# Altium PCB LED Driver PCB.PcbDoc
Units mm, origin at the board's own origin, x right, y up, seen from the top; angles counter-clockwise.
Board outline 95 x 86.5 mm, 2 copper layers (Top Layer, Bottom Layer); 81 components, 56 nets, 263 pads, 86 vias.
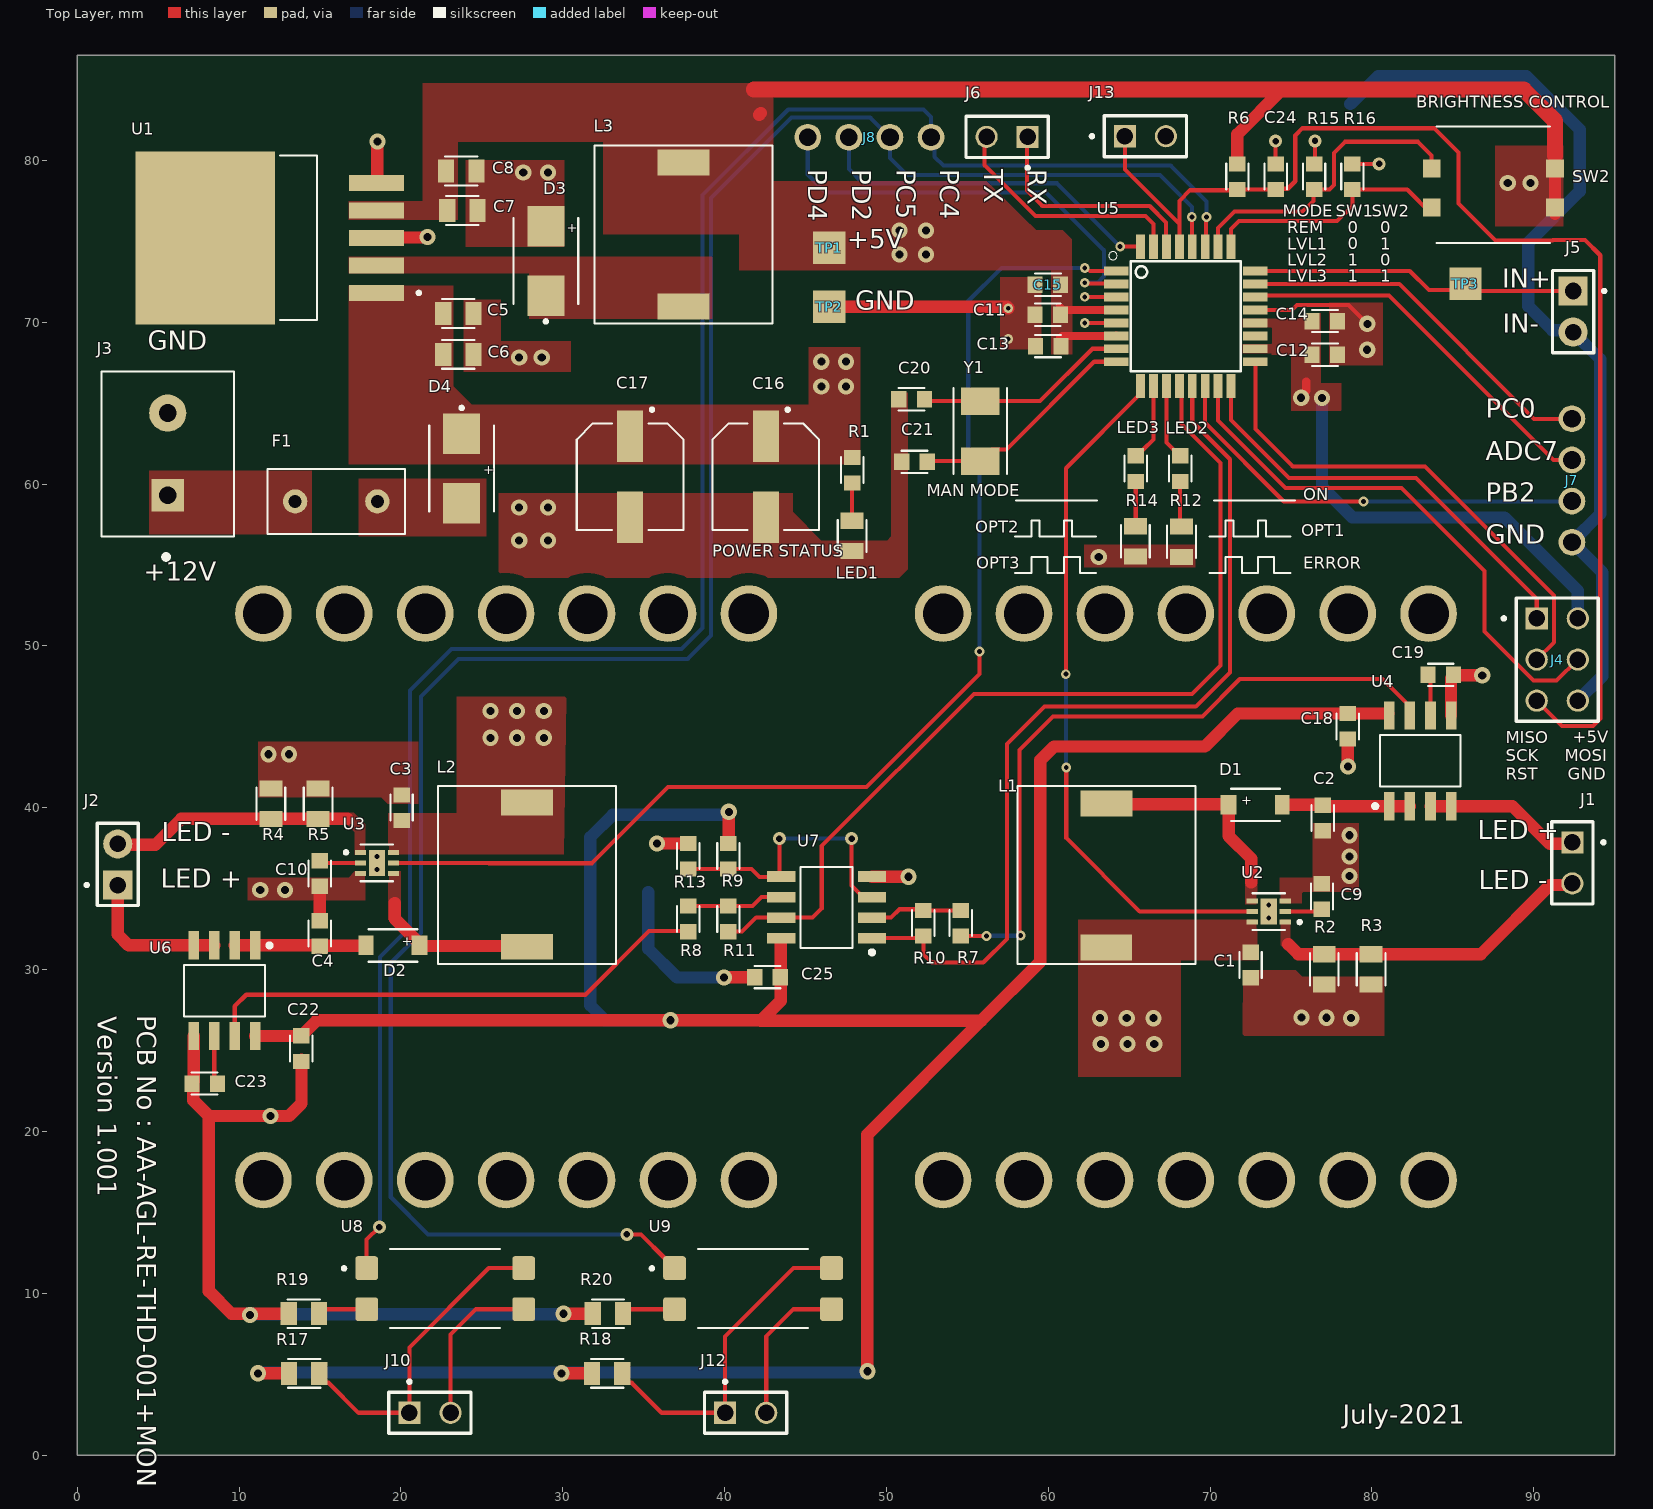
[diagram p0: Top Layer view]
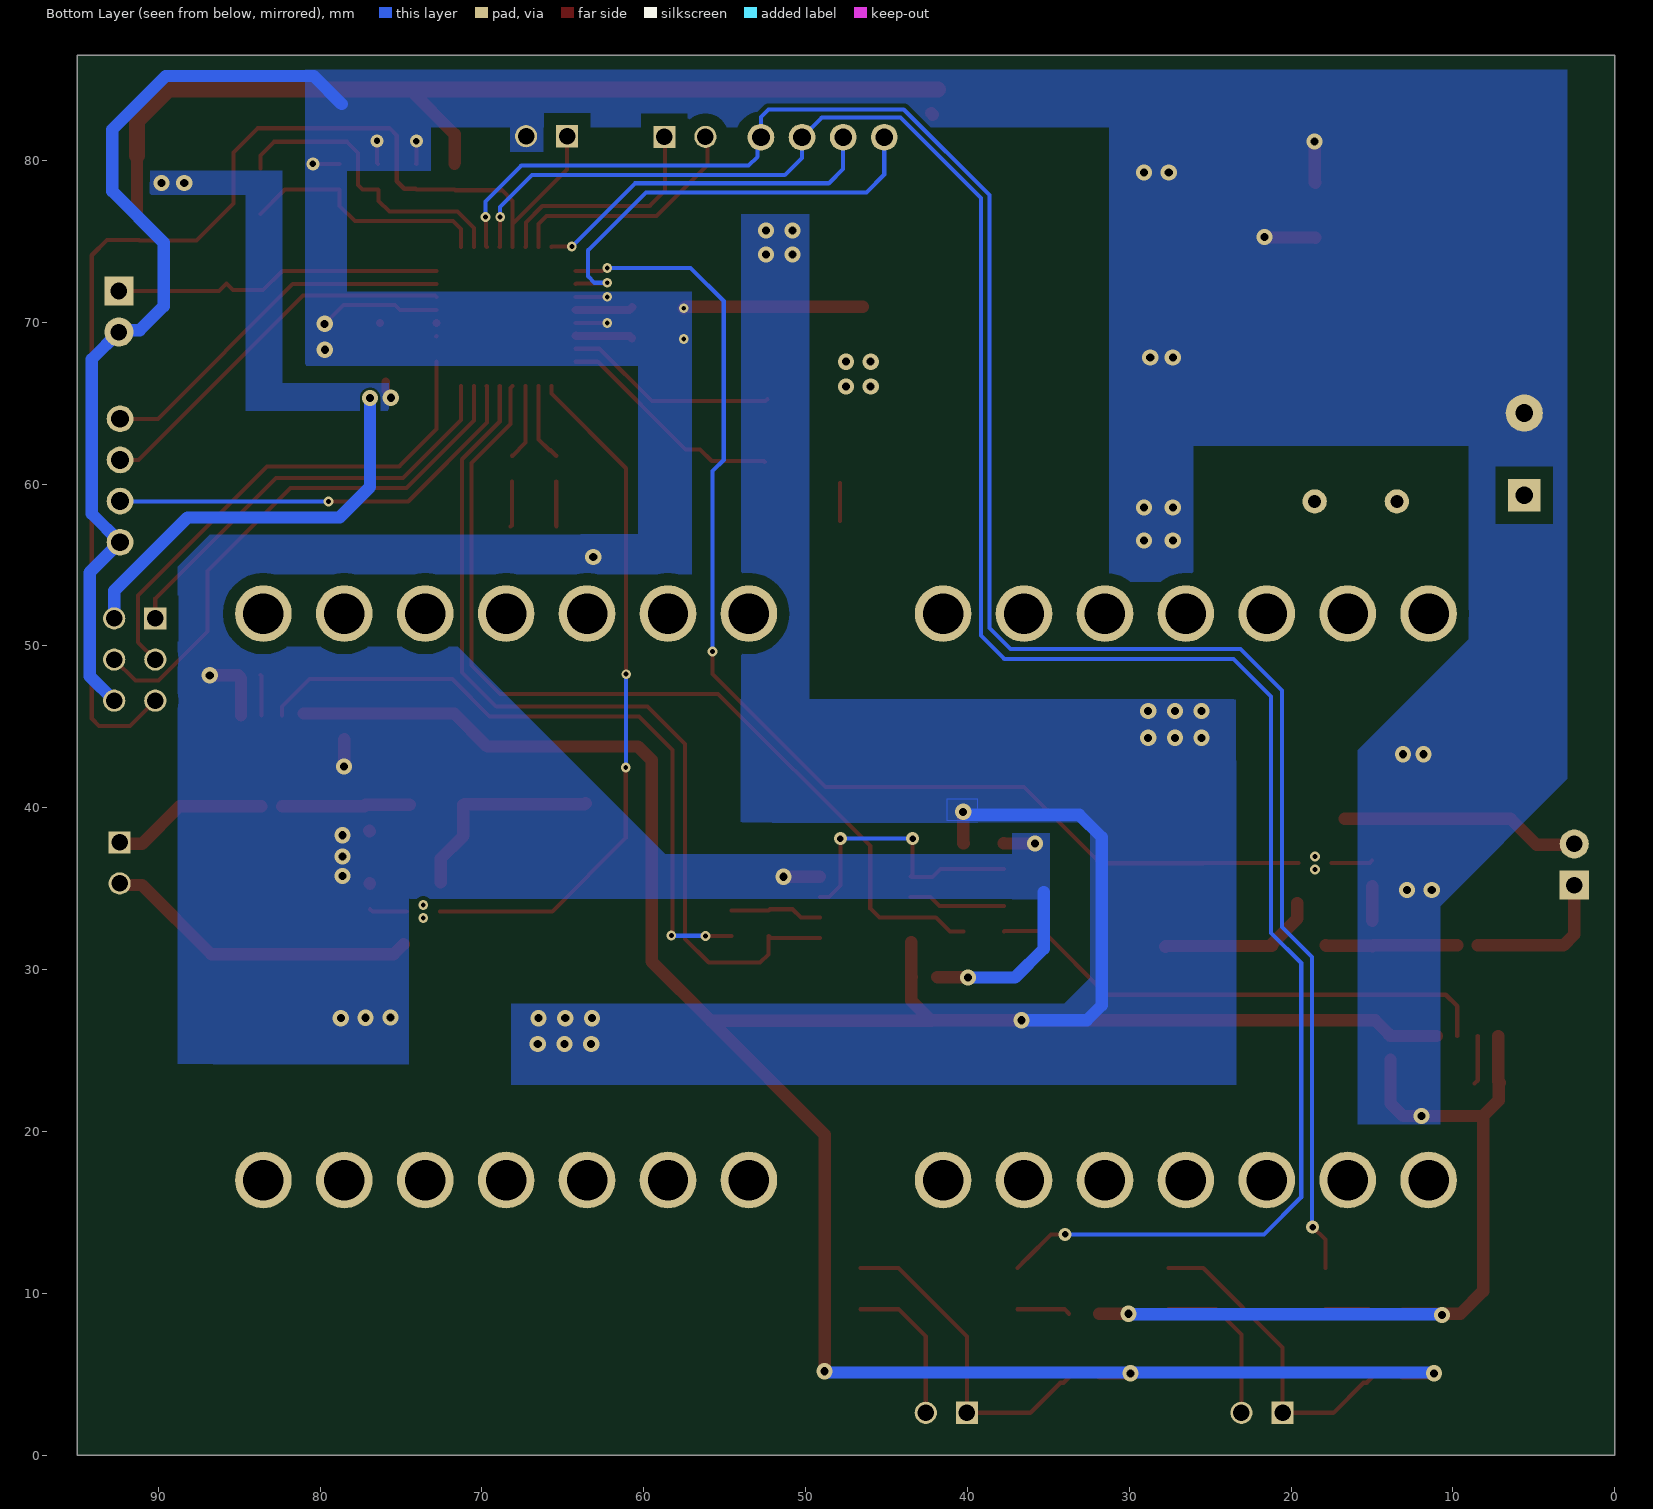
[diagram p1: Bottom Layer view, seen from below]

## Layer stack, top to bottom
Top Solder: solder mask 0.0102, Solder Resist, Dk 3.5
Top Layer: signal copper 0.0356
Dielectric 1: dielectric 0.32, FR-4, Dk 4.8
Bottom Layer: signal copper 0.0356
Bottom Solder: solder mask 0.0102, Solder Resist, Dk 3.5

## Board outline
0,86.5 95,86.5 95,0 0,0

## Design rules (kind name [scope] priority, off if disabled: settings)
Clearance "Power Clearance" [InNet('+12') or InNet('+5') or InNet('GND')] p1: gap=0.254 ignorepadtopadclearanceinfootprint=FALSE except(0: Arc-Hole Track-Hole SMDPad-Hole THPad-Hole Via-Hole Fill-Hole Poly-Hole Region-Hole Text-Hole; 0.127: SMDPad-SMDPad; 0.762: THPad-Fill THPad-Poly THPad-Region)
Clearance [All] p2: gap=0.254 ignorepadtopadclearanceinfootprint=FALSE except(0: Arc-Hole Track-Hole SMDPad-Hole THPad-Hole Via-Hole Fill-Hole Poly-Hole Region-Hole Text-Hole; 0.127: SMDPad-SMDPad; 1.27: Fill-Text Poly-Text Region-Text)
PolygonConnect [All] p1: connectstyle=Direct reliefconductorwidth=0.254 reliefentries=4 polygonreliefangle="90 Angle" airgapwidth=0.254
RoutingVias "Power Vias" [InNetClass('LED_Current') or InNet('+12') or InNet('+5') or InNet('GND')] p1: holewidth=0.7 width=1.4 viastyle="Through Hole" minholewidth=0.3 minwidth=0.6 maxholewidth=0.8 maxwidth=1.6
RoutingVias "Signal Vias" [All] p2: holewidth=0.4 width=0.8 viastyle="Through Hole" minholewidth=0.3 minwidth=0.6 maxholewidth=0.5 maxwidth=1
SolderMaskExpansion [All] p1: expansion=0.102 istentingtop=FALSE
Width "Schematic Width Constraint" [InNetClass('LED_Current')] p1: maxlimit=1.016 minlimit=0.254 preferedwidth=0.762 minimp=50.000000 maximp=50.000000 favimp=50.000000
Width [All] p2: maxlimit=1 minlimit=0.254 preferedwidth=0.254 minimp=50.000000 maximp=50.000000 favimp=50.000000
30 further rules are at their usual default settings.

## Classes and differential pairs
net class LED_Current: +5 LED_ANODE_1 LED_ANODE_1_OUT LED_ANODE_2 LED_ANODE_2_OUT LED_CATHODE_1 LED_CATHODE_2 NetD1_A NetD2_A

## Components (designator, comment, footprint, x,y, rotation, side; value= is the part's Value field where it differs from the comment)
C1 "4.7uF" RES603 72.5,30.29 r90 top
C2 "1uF" RES603 76.962,39.372 r90 top
C3 "4.7uF" RES603 20.041,40.007 r270 top
C4 "1uF" RES603 14.986,32.232 r270 top
C5 "10uF" RES805 23.548,70.541 r180 top
C6 "10uF" RES805 23.546,68.021 r180 top
C7 "10uF" RES805 23.8,76.911 r180 top
C8 "10uF" RES805 23.724,79.35 r180 top
C9 "220nF" RES603 76.911,34.523 r270 top
C10 "220nF" RES603 14.986,35.943 r90 top
C11 "0.1uF" RES603 59.967,70.462 r0 top
C12 "0.1uF" RES603 77.089,67.998 r180 top
C13 "0.1uF" RES603 59.995,68.531 r0 top
C14 "0.1uF" RES603 77.089,70.081 r180 top
C15 "1uF" RES603 59.972,72.314 r0 top
C16 "47uF" VEJ470M1HTR-0607 42.545,60.454 r270 top
C17 "47uF" VEJ470M1HTR-0607 34.163,60.454 r270 top
C18 "0.1uF" RES603 78.511,45.034 r90 top
C19 "100nF" RES603 84.252,48.211 r180 top
C20 "22pF" RES603 51.555,65.247 r180 top
C21 "22pF" RES603 51.732,61.373 r180 top
C22 "0.1uF" RES603 13.843,25.123 r90 top
C23 "100nF" RES603 7.874,22.964 r0 top
C24 "0.1uF" RES603 74.054,79 r270 top
C25 "0.1uF" RES603 42.647,29.542 r0 top
D1 "LMBR0540T1G" LMBR0540T1G 72.796,40.185 r180 top
D2 "LMBR0540T1G" LMBR0540T1G 19.5,31.5 r0 top
D3 "B330B-13-F" B330B-13-F 28.956,73.798 r90 top
D4 "B330B-13-F" B330B-13-F 23.749,60.962 r270 top
F1 "Fuse" 39215000000 16.002,58.93 r0 top
J1 "2 Pin Header" "2POS 2.54mm Pin Header"#1 92.382,36.596 r270 top
J2 "2 Pin Header" "2POS 2.54mm Pin Header"#2 2.5,36.5 r90 top
J3 "2 Pin Header" "2POS 5.08mm Screw Connector" 5.588,61.851 r90 top
J4 "3x2 Pin Header" "2x3POS 2.54mm Pin Header" 91.449,49.162 r90 top
J5 "2 Pin Header" "2POS 2.54mm Pin Header"#2 92.431,70.665 r270 top
J6 "2 Pin Header" "2POS 2.54mm Pin Header"#1 57.455,81.46 r180 top
J7 "4 Pin Header" "4POS 2.54MM PIN HEADER" 92.354,60.225 r270 top
J8 "4 Pin Header" "4POS 2.54MM PIN HEADER" 48.946,81.434 r0 top
J10 "2 Pin Header" "2POS 2.54mm Pin Header"#1 21.793,2.618 r0 top
J12 "2 Pin Header" "2POS 2.54mm Pin Header"#1 41.3,2.618 r0 top
J13 "2 Pin Header" "2POS 2.54mm PIN Header - duplicate" 66,81.5 r0 top
L1 "Inductor" CDRH104RNP-220NC 63.59,35.846 r90 top
L2 "Inductor" CDRH104RNP-220NC 27.783,35.846 r270 top
L3 "Inductor" CDRH104RNP-220NC 37.465,75.44 r90 top
LED1 "LED" LED603 47.879,60.863 r270 top
LED2 "LED" LED603 68.148,60.962 r270 top
LED3 "LED" LED603 65.405,60.962 r270 top
R1 "2.4k" RES805 47.879,56.798 r90 top
R2 "1.15" RES805 77.052,30.013 r90 top
R3 "1.15" RES805 79.95,30.013 r90 top
R4 "1.15" RES805 11.96,40.253 r270 top
R5 "1.15" RES805 14.883,40.253 r270 top
R6 "10K" RES603 71.686,79 r90 top
R7 "1k" RES603 54.585,32.87 r270 top
R8 "1k" RES603 37.746,33.138 r270 top
R9 "100k" RES603 40.234,37.012 r90 top
R10 "3.3k" RES603 52.273,32.87 r90 top
R11 "3.3k" RES603 40.234,33.138 r90 top
R12 "1k" RES805 68.224,56.441 r270 top
R13 "100k" RES603 37.746,37.012 r270 top
R14 "1k" RES805 65.38,56.466 r270 top
R15 "10k" RES603 76.423,79 r270 top
R16 "10k" RES603 78.791,79 r270 top
R17 "150" RES805 14.016,5.057 r180 top
R18 "150" RES805 32.741,5.057 r180 top
R19 "330" RES805 14,8.739 r0 top
R20 "330" RES805 32.791,8.739 r0 top
SW2 "2 DIP Switch" EM-02KP 87.5,78.5 r180 top
TP1 "Test Point" "TP SMD" 46.457,74.602 r0 top
TP2 "Test Point" "TP SMD" 46.457,70.97 r0 top
TP3 "Test Point" "TP SMD" 85.776,72.392 r0 top
U1 "LM2596" LM2596-TO263 7.902,75.215 r180 top
U2 "TPS61165" TPS611DRVR 73.619,33.592 r180 top
U3 "TPS61165" TPS611DRVR 18.516,36.593 r0 top
U4 "ACS712" SOIC127P600X175-8N 82.982,42.903 r90 top
U5 "ATMEGA328P" ATMEGA328P-AU 68.496,70.365 r0 top
U6 "ACS712" SOIC127P600X175-8N 9.095,28.7 r270 top
U7 "LM358" SOIC127P600X175-8N 46.303,33.851 r180 top
U8 "EL817S1" EL817S1 22.733,10.289 r0 top (schematic designator J9)
U9 "EL817S1" EL817S1 41.758,10.289 r0 top (schematic designator J11)
Y1 "Crystal" X503216MSB2GI 55.796,63.278 r90 top

## Footprints (in the part's own frame and the unit in brackets; to place one, negate y for a bottom-side part, rotate by r counter-clockwise, add the part's x,y. Pads: shape width x height; smd on the part's side, far side on the other; paste and mask are expansions set on the pad)
"2POS 2.54mm Pin Header"#1 [mm]
  rect 1.37x1.37 hole 1.02: 1(-1.27,0)
  round 1.37 hole 1.02: 2(1.27,0)
  silkscreen extent -2.54,-1.27 2.54,2.02
"2POS 2.54mm Pin Header"#2 [mm]
  rect 1.8x1.8 hole 1.02: 1(-1.27,0)
  round 1.8 hole 1.02: 2(1.27,0)
  silkscreen extent -2.54,-1.27 2.54,2.02
"2POS 2.54mm PIN Header - duplicate" [mm]
  rect 1.37x1.37 hole 1.02: 1(-1.27,0)
  round 1.37 hole 1.02: 2(1.27,0)
  silkscreen extent -3.4,-1.27 2.54,1.27
"2POS 5.08mm Screw Connector" [mm]
  rect 2x2 hole 1.1: 1(-2.54,0)
  round 2.3 hole 1.1: 2(2.54,0)
  silkscreen extent -6.5,-4.1 5.11,4.1
"2x3POS 2.54mm Pin Header" [mm]
  rect 1.37x1.37 hole 1.02: 1(2.54,1.27)
  round 1.37 hole 1.02: 2(0,1.27) 3(-2.54,1.27) 4(-2.54,-1.27) 5(0,-1.27) 6(2.54,-1.27)
  silkscreen extent -3.81,-2.54 3.81,3.4
"4POS 2.54MM PIN HEADER" [mm]
  round 1.65 hole 1.1: 1(-3.81,0) 2(-1.27,0) 3(1.27,0) 4(3.81,0)
39215000000 [mm]
  round 1.5 hole 0.8: 1(-2.54,0) 2(2.54,0)
  silkscreen extent -4.25,-2 4.25,2
ATMEGA328P-AU [mm]
  rect 1.5x0.55 smd: 1(-4.3,2.8) 2(-4.3,2) 3(-4.3,1.2) 4(-4.3,0.4) 5(-4.3,-0.4) 6(-4.3,-1.2) 7(-4.3,-2) 8(-4.3,-2.8) 17(4.3,-2.8) 18(4.3,-2) 19(4.3,-1.2) 20(4.3,-0.4) 21(4.3,0.4) 22(4.3,1.2) 23(4.3,2) 24(4.3,2.8)
  rect 0.55x1.5 smd: 9(-2.8,-4.3) 10(-2,-4.3) 11(-1.2,-4.3) 12(-0.4,-4.3) 13(0.4,-4.3) 14(1.2,-4.3) 15(2,-4.3) 16(2.8,-4.3) 25(2.8,4.3) 26(2,4.3) 27(1.2,4.3) 28(0.4,4.3) 29(-0.4,4.3) 30(-1.2,4.3) 31(-2,4.3) 32(-2.8,4.3)
  silkscreen extent -4.75,-3.4 3.4,4
B330B-13-F [mm]
  rect 2.5x2.3 smd: A(2.15,0) C(-2.15,0)
  silkscreen extent -3.85,-2 2.65,2
CDRH104RNP-220NC [mm]
  rect 1.6x3.2 smd: 1(-4.471,0.01) 2(4.429,0)
  silkscreen extent -5.5,-5.5 5.5,5.5
EL817S1 [mm]
  rrect25% 1.41x1.47 smd: 1(-4.85,1.27) 2(-4.85,-1.27) 3(4.85,-1.27) 4(4.85,1.27)
  silkscreen extent -6.35,-2.44 3.4,2.44
EM-02KP [mm]
  rect 1.1x1.1 smd: 1(-3.81,1.4) 2(-3.81,-1) 3(3.81,-1) 4(3.81,1.4)
  silkscreen extent -3.5,-3.6 3.5,3.6
LED603 [mm]
  rect 0.94x1.02 smd: A(-0.79,0) C(0.79,0)
  silkscreen extent -0.8,-0.69 0.8,0.69
LM2596-TO263 [mm]
  rect 3.4x1 smd paste-3 mask+0: 1(-10.6,3.4) 2(-10.6,1.7) 3(-10.6,0) 4(-10.6,-1.7) 5(-10.6,-3.4)
  rect 8.6x10.7 smd paste-6 mask+0: 6(0,0)
  silkscreen extent -13.3,-5.08 -4.62,5.08
LMBR0540T1G [mm]
  rect 0.99x1.22 smd: A(1.655,0)
  rect 0.91x1.22 smd: C(-1.655,0)
  silkscreen extent -1.5,-1 1.5,1
RES603 [mm]
  rect 0.94x1.02 smd: 1(-0.79,0) 2(0.79,0)
  silkscreen extent -0.8,-0.69 0.8,0.69
RES805 [mm]
  rect 1x1.42 smd: 1(-0.935,0) 2(0.935,0)
  silkscreen extent -1,-0.89 1,0.89
SOIC127P600X175-8N [mm] "SOIC, 8-Leads, Body 4.90x3.90mm, Pitch 1.27mm, IPC Medium Density"
  rect 1.75x0.65 smd: 1(-2.8,1.905) 2(-2.8,0.635) 3(-2.8,-0.635) 4(-2.8,-1.905) 5(2.8,-1.905) 6(2.8,-0.635) 7(2.8,0.635) 8(2.8,1.905)
  silkscreen extent -2.92,-2.5 1.6,2.9, body extent -2.68,-2.5 2.68,2.5, height 1.8
"TP SMD" [mm]
  rect 2x2 smd: 1(0,0)
TPS611DRVR [mm]
  rect 0.69x0.32 smd: 1(-1.02,0.65) 2(-1.02,0) 3(-1.02,-0.65) 4(1.02,-0.65) 5(1.02,0) 6(1.02,0.65)
  rect 1x1.6 smd paste-2: 7(0,0)
  silkscreen extent -2.01,-1.13 1,1.13
VEJ470M1HTR-0607 [mm]
  rect 3.2x1.6 smd: 1(-2.5,0) 2(2.5,0)
  silkscreen extent -4.25,-3.3 3.3,3.3, body extent 0,0 0,0
X503216MSB2GI [mm]
  rect 1.7x2.4 smd: 1(-1.85,0) 2(1.85,0)
  silkscreen extent -2.65,-1.65 2.65,1.65

## Part data
C1 C2 C3 C4 C5 C6 C7 C8 C9 C10 C11 C12 C13 C14 C15 C18 C19 C20 C21 C22 C23 C24 C25: library part Capacitor
C16 C17: library part "Cap Pol"
D1 D2 D3 D4: library part "Schottky Diode"
R1 R2 R3 R4 R5 R6 R7 R8 R9 R10 R11 R12 R13 R14 R15 R16 R17 R18 R19 R20: library part Resistor

## Free pads (board coordinates)
  round 3.5 hole 2.5: 8(11.5,17) 8(11.5,52) 8(53.5,17) 8(53.5,52) 9(16.5,17) 9(16.5,52) 9(58.5,17) 9(58.5,52) 10(21.5,17) 10(21.5,52) 10(63.5,17) 10(63.5,52) 11(26.5,17) 11(26.5,52) 11(68.5,17) 11(68.5,52) 12(31.5,17) 12(31.5,52) 12(73.5,17) 12(73.5,52) 13(36.5,17) 13(36.5,52) 13(78.5,17) 13(78.5,52) 14(41.5,17) 14(41.5,52) 14(83.5,17) 14(83.5,52)

## Via types
v1: diameter 1, hole 0.5, Top Layer to Bottom Layer, 60 vias
v2: diameter 0.6, hole 0.3, Top Layer to Bottom Layer, 19 vias
v3: diameter 0.8, hole 0.4, Top Layer to Bottom Layer, 7 vias

## Nets (pads, with @x,y where several pads share a name; then routed paths per layer and width w, separated by ;. In a path a pad name is that pad's centre, name@x,y a point inside that pad or via, vN(x,y) a via of type N, cw(c..) or ccw(c..) an arc to the next point about the centre after c; other vN are vias at no path point)
+5: C1.2 C3.2 C7.2 C8.2 C11.2 C12.2 C13.2 C14.2 C15.2 C18.2 C22.2 C25.2 J4.6 L1.1 L2.1 L3.2 R6.2 R9.2 R17.2 R18.2 SW2.1 SW2.2 TP1.1 U1.4 U2.6 U3.6 U4.8 U5.4 U5.6 U5.18 U5.20 U6.8 U7.8 | length 279.7
  Top Layer w0.508: C11.2@60.706,70.944 60.885,70.765 U5.4 ; C13.2@60.72,69.028 60.734,69.014 60.868,69.148 64.179,69.148 U5.6 ; U5.20 U5.20@72.802,69.959 ; v1(75.626,65.341) 75.626,65.451 75.946,65.771 75.946,66.321 ; C14.2@76.293,69.959 C14.2@76.299,69.954
  Top Layer w0.762: U6.8 C22.2@13.683,25.9 ; v1(11.176,5.057) R17.2 ; C22.2 13.883,25.913 13.972,26.002 13.972,26.042 14.806,26.875 v1(36.652,26.875) 42.215,26.875 42.24,26.85 ; v1(29.921,5.057) R18.2 ; R9.2 40.246,37.815 40.246,39.74 v1(40.259,39.753) ; 41.758,84.432 41.808,84.381 ; 42.139,82.831 42.236,82.928 ; U7.8@43.47,31.701 43.47,29.575 C25.2 43.473,29.505 43.473,28.083 42.24,26.85 ; v1(48.819,5.184) 48.819,19.814 55.855,26.85 ; R6.2 71.686,79.872 71.679,79.879 71.679,81.612 74.447,84.381 ; U4.8@81.021,45.824 C18.2 71.704,45.824 69.672,43.792 60.35,43.792 59.512,42.953 59.512,30.507 55.855,26.85 ; SW2.1@91.31,76.7 91.31,80.3 ; 42.24,26.85 55.855,26.85
  Top Layer w1: 41.808,84.381 74.447,84.381 89.383,84.381 91.31,82.453 91.31,80.3
  Bottom Layer w0.762: v1(11.176,5.057) 11.222,5.102 11.39,5.102 11.395,5.107 48.574,5.107 48.605,5.138 48.773,5.138 v1(48.819,5.184) ; v1(36.652,26.875) 32.625,26.875 31.699,27.801 31.699,38.178 33.096,39.575 40.017,39.575 40.195,39.753 v1(40.259,39.753) ; v1(76.911,65.331) 76.911,59.819 78.791,57.939 88.189,57.939 92.71,53.418 92.71,51.711 J4.6
  other v1: 63.246,25.402 64.897,25.402 66.548,25.402 63.198,27 64.849,27 66.5,27 25.527,44.325 27.178,44.325 28.829,44.325 25.527,45.976 27.178,45.976 28.829,45.976 50.8,74.193 52.451,74.193 50.8,75.667 52.451,75.667 88.392,78.615 89.789,78.615
+12: C5.2 C6.2 C16.1 C17.1 D4.C LED1.A U1.1
  other v1: 45.974,66.042 47.498,66.042 45.974,67.566 47.498,67.566
ADC_IN: J5.1 TP3.1 U5.24 | length 20.5
  Top Layer w0.254: U5.24 82.336,73.165 83.515,71.986 85.369,71.986 TP3.1 86.233,71.935 J5.1
ANALOG_IN_1: J7.1 U5.23 | length 23
  Top Layer w0.254: U5.23 81.688,72.365 90.018,64.035 J7.1
ANALOG_IN_3: J7.2 U5.22 | length 23.8
  Top Layer w0.254: U5.22 72.886,71.655 81.051,71.655 91.211,61.495 J7.2
ANALOG_IN_4: J8.4 U5.27 U8.1 | length 123.1
  Top Layer w0.254: U8.1 17.883,13.315 v3(18.661,14.093) ; U5.27 69.735,74.704 69.735,76.468 v2(69.774,76.507)
  Bottom Layer w0.254: v3(18.661,14.093) 18.694,14.127 18.694,30.787 20.549,32.641 20.549,47.246 23.114,49.811 37.325,49.811 38.631,51.117 38.631,77.86 43.933,83.162 52.282,83.162 52.756,82.687 J8.4 52.971,81.219 52.971,80.228 53.518,79.682 67.564,79.682 69.774,77.472 v2(69.774,76.507)
ANALOG_IN_5: J8.3 U5.28 U9.1 | length 134.8
  Top Layer w0.254: v3(33.96,13.642) 34.825,13.642 36.33,12.137 36.333,12.137 36.908,11.562 U9.1 ; v2@68.873,76.444 68.885,76.433 68.885,74.676 U5.28
  Bottom Layer w0.254: v3(33.96,13.642) 21.666,13.642 19.369,15.939 19.369,30.406 21.234,32.271 21.234,46.89 23.546,49.202 37.719,49.202 39.167,50.65 39.167,77.677 44.143,82.654 48.997,82.654 J8.3 50.216,80.164 51.283,79.098 66.904,79.098 68.873,77.128 v2(68.873,76.507)
GND: C1.1 C2.1 C3.1 C4.1 C5.1 C6.1 C7.1 C8.1 C9.1 C10.1 C11.1 C12.1 C13.1 C14.1 C15.1 C16.2 C17.2 C18.1 C19.1 C20.2 C21.2 C22.1 C23.1 C24.1 C25.1 D3.A J3.2 J4.4 J5.2 J7.4 J13.2 R1.1 R2.1 R3.1 R4.1 R5.1 R12.2 R13.1 R14.2 R15.1 R16.1 R19.1 R20.1 TP2.1 U1.3 U1.5 U2.3 U3.3 U4.5 U5.3 U5.5 U5.21 U6.5 U7.4 | length 165.4
  Top Layer w0.254: v2@62.082,69.957 v2@62.085,69.959 ; v2@62.082,71.573 v2@62.086,71.569 ; v2@62.259,71.569 64.192,71.569 U5.3 ; v2@62.361,69.959 64.19,69.959 U5.5 ; U5.21 75.07,70.765 75.376,71.071 78.548,71.071 v1(79.713,69.906) ; v3(74.043,81.19) 74.043,79.805 74.041,79.803 C24.1 ; R15.1 76.479,79.847 v3(76.479,81.212) ; R16.1 78.797,79.783 v3(80.442,79.783)
  Top Layer w0.762: U6.5 7.19,23.11 7.084,23.004 7.173,22.915 7.173,21.912 8.128,20.957 ; R19.1 9.526,8.739 8.128,10.137 8.128,20.957 ; C22.1@13.851,24.448 13.851,21.727 13.081,20.957 v1(11.938,20.957) 8.128,20.957 ; C4.1 C10.1 ; U1.3 18.526,75.239 21.617,75.239 v1(21.641,75.262) ; U1.5 18.542,78.655 v1(18.542,81.18) ; v1(30.048,8.74) R20.1 ; v1(35.814,37.797) 35.817,37.8 37.743,37.8 R13.1 ; v1(39.954,29.517) 39.967,29.529 41.844,29.529 C25.1 ; TP2.1 57.429,70.97 v2(57.527,70.872) ; U7.4 49.111,35.748 51.351,35.748 v1(51.359,35.74) ; C9.1 C9.1@76.937,35.339 ; C2.1@76.937,38.557 C2.1 ; v1(78.511,42.547) C18.1 ; U4.5 84.887,48.016 85.042,48.171 C19.1 85.055,48.198 86.804,48.198 v1(86.817,48.186)
  Bottom Layer w0.762: v1(10.668,8.663) 10.706,8.701 30.01,8.701 v1(30.048,8.74) ; 35.281,34.775 35.281,31.295 37.059,29.517 v1(39.954,29.517) ; J13.2 J13.2@67.386,81.616 ; 78.663,83.491 80.391,85.219 89.535,85.219 92.837,81.917 92.837,78.107 89.662,74.932 89.662,70.995 91.15,69.507 92.318,69.507 J5.2 94.107,67.718 94.107,58.168 J7.4 94.234,54.536 94.234,48.137 J4.4
  other v1: 78.715,27.002 77.191,27.028 75.641,27.053 11.303,34.927 12.827,34.927 78.613,35.791 78.613,36.984 78.613,38.305 11.811,43.309 13.081,43.309 63.119,55.501 27.305,56.517 29.083,56.517 27.305,58.549 29.083,58.549 27.305,67.82 28.702,67.82 79.705,68.303 27.559,79.25 29.083,79.25
  other v2: 57.527,68.967 62.255,69.957 62.255,71.573
INA-: R7.1 R10.2 U7.2 | length 5.7
  Top Layer w0.254: U7.2 50.283,33.216 50.8,33.733 52.2,33.733 R10.2 R7.1
INB-: R8.1 R11.2 U7.6 | length 6
  Top Layer w0.254: R8.1 R11.2 41.724,33.928 42.282,34.486 U7.6
LED1: LED2.A U5.11 | length 4.7
  Top Layer w0.254: U5.11 67.296,62.564 68.108,61.752 LED2.A
LED2: LED3.A U5.10 | length 4.8
  Top Layer w0.254: LED3.A 65.748,62.095 65.827,62.095 66.496,62.764 U5.10
LED_ANODE_1: C2.2 D1.C U4.1 U4.2 | length 7.9
  Top Layer w0.762: D1.C 76.835,40.185 77.165,40.185 77.247,40.103 U4.1 U4.2
LED_ANODE_1_OUT: J1.1 U4.3 U4.4 | length 9.8
  Top Layer w0.762: U4.3 U4.4 88.667,40.103 91,37.77 92.286,37.77 J1.1
LED_ANODE_2: C4.2 D2.C U6.1 U6.2 | length 8.2
  Top Layer w0.762: U6.2 14.928,31.5 C4.2 15.015,31.471 17.816,31.471 D2.C
LED_ANODE_2_OUT: J2.1 U6.3 U6.4 | length 9.3
  Top Layer w0.762: J2.1 2.5,32.173 3.173,31.5 U6.4 U6.3
LED_CATHODE_1: J1.2 R2.2 R3.2 U2.1 | length 19.6
  Top Layer w0.762: 74.828,31.574 75.454,30.948 R2.2 R3.2 86.718,30.948 91,35.23 92.286,35.23 J1.2
LED_CATHODE_2: J2.2 R4.2 R5.2 U3.1 | length 14.9
  Top Layer w0.762: J2.2 2.549,37.721 4.826,37.721 6.423,39.318 R4.2 R5.2 16.691,39.318
MISO: J4.1 U5.16 | length 26.8
  Top Layer w0.254: U5.16 71.296,63.961 74.879,60.378 82.728,60.378 90.179,52.926 J4.1
MOSI: J4.5 U5.15 | length 33.8
  Top Layer w0.254: U5.15 70.496,63.923 74.651,59.768 81.813,59.768 86.944,54.637 86.944,50.89 89.978,47.856 91.413,47.856 J4.5
NetC9_2: C9.2 U2.2 | length 2.3
  Top Layer w0.254: U2.2 76.77,33.592 C9.2
NetC10_2: C10.2 U3.2 | length 2.6
  Top Layer w0.254: C10.2 15.126,36.593 U3.2
NetC19_2: C19.2 U4.6 | length 2.5
  Top Layer w0.254: U4.6 83.617,48.138 C19.2@83.69,48.211
NetC20_1: C20.1 U5.7 Y1.2 | length 13.2
  Top Layer w0.254: C20.1 52.464,65.128 Y1.2 ; Y1.2 59.487,65.128 62.724,68.365 U5.7
NetC21_1: C21.1 U5.8 Y1.1 | length 14.2
  Top Layer w0.254: C21.1 52.577,61.428 Y1.1 56.519,62.151 57.425,62.151 62.839,67.565 U5.8
NetC23_2: C23.2 U6.6 | length 3
  Top Layer w0.254: U6.6 8.46,23.168 C23.2
NetD1_A: D1.A L1.2 U2.4 | length 13
  Top Layer w0.762: L1.2 63.635,40.23 71.097,40.23 D1.A 71.142,38.258 72.542,36.857 72.542,35.384
NetD2_A: D2.A L2.2 U3.4 | length 9.9
  Top Layer w0.762: 19.609,34.114 19.609,33.161 21.154,31.615 D2.A 21.196,31.459 27.742,31.459 L2.2
NetD3_C: D3.C L3.1 U1.2
NetD4_A: D4.A F1.2
NetF1_1: F1.1 J3.1
NetJ10_1: J10.1 R17.1 U8.4 | length 19.8
  Top Layer w0.254: R17.1 14.951,4.847 15.324,4.474 15.534,4.474 17.389,2.618 J10.1 20.523,6.657 25.425,11.559 U8.4
NetJ10_2: J10.2 U8.3 | length 10
  Top Layer w0.254: J10.2 23.063,7.444 24.638,9.019 U8.3
NetJ12_1: J12.1 R18.1 U9.4 | length 20.5
  Top Layer w0.254: R18.1 33.676,4.847 34.049,4.474 34.259,4.474 36.114,2.618 J12.1 40.03,7.343 44.247,11.559 U9.4
NetJ12_2: J12.2 U9.3 | length 9.5
  Top Layer w0.254: J12.2 42.57,7.343 44.247,9.019 U9.3
NetLED1_C: LED1.C R1.2 | length 2.3
  Top Layer w0.254: R1.2 LED1.C
NetLED2_C: LED2.C R12.1 | length 2.8
  Top Layer w0.254: LED2.C 68.148,57.452 R12.1
NetLED3_C: LED3.C R14.1 | length 2.8
  Top Layer w0.254: R14.1 65.405,57.427 LED3.C
NetR19_2: R19.2 U8.2 | length 3.1
  Top Layer w0.254: R19.2 15.215,9.019 U8.2
NetR20_2: R20.2 U9.2 | length 3.3
  Top Layer w0.254: R20.2 34.006,9.019 U9.2
PD2: J8.2 U5.32 | length 22
  Top Layer w0.254: v2(64.44,74.678) 65.683,74.678 U5.32
  Bottom Layer w0.254: J8.2 47.676,79.479 48.565,78.59 60.528,78.59 v2(64.44,74.678)
PD4: J8.1 U5.2 | length 27.4
  Top Layer w0.254: v2@62.082,72.443 v2@62.13,72.395 ; v2@62.354,72.395 64.166,72.395 U5.2
  Bottom Layer w0.254: J8.1 45.136,79.123 46.228,78.031 59.868,78.031 63.449,74.449 63.449,72.849 63.043,72.443 v2@62.306,72.443
  other v2: 62.255,72.443
PWM_1: U2.5 U5.9 | length 43.2
  Top Layer w0.254: v2(61.087,48.262) 61.087,60.981 65.696,65.59 U5.9 ; v2(61.112,42.496) 61.112,38.127 65.648,33.592 U2.5
  Bottom Layer w0.254: v2(61.087,48.262) 61.087,42.522 v2(61.112,42.496)
PWM_2: U3.5 U5.1 | length 74.5
  Top Layer w0.254: U3.5 25.423,36.593 25.438,36.578 31.801,36.578 36.5,41.277 48.768,41.277 55.753,48.262 v2(55.753,49.659) ; v2@62.176,73.355 62.082,73.355 v2@62.273,73.165 ; 62.582,73.165 U5.1
  Bottom Layer w0.254: v2(55.753,49.659) 55.753,60.805 55.054,61.503 55.054,71.312 57.097,73.355 v2@62.298,73.355
  other v2: 62.255,73.355
PWM_3: J7.3 U5.14 | length 27
  Top Layer w0.254: U5.14 69.672,66.041 69.672,63.807 74.549,58.93 v2(79.477,58.93)
  Bottom Layer w0.254: v2(79.477,58.93) 92.329,58.93 J7.3
RESET: C24.2 J4.3 J13.1 R6.1 U5.29 | length 77.7
  Top Layer w0.254: J13.1 64.73,79.45 68.096,76.084 ; U5.29 68.096,76.084 ; C24.2@74.04,78.21 R6.1 71.639,78.162 68.764,78.162 68.096,77.494 68.096,76.084 ; C24.2 74.097,78.253 74.797,78.253 75.26,78.717 75.26,81.536 75.717,81.993 83.845,81.993 85.344,80.495 85.344,77.345 87.63,75.059 91.161,75.059 91.186,75.084 93.167,75.084 94.107,74.145 94.107,45.519 93.65,45.062 91.74,45.062 J4.3
RXD: J6.1 U5.30 | length 14.3
  Top Layer w0.254: J6.1 58.674,81.409 58.674,78.147 59.629,77.193 66.269,77.193 67.285,76.177 67.285,74.676 U5.30
SCK: J4.2 U5.17 | length 31.3
  Top Layer w0.254: U5.17 72.796,63.401 75.108,61.089 83.287,61.089 91.245,53.13 91.245,50.228 J4.2
SENS_1: R7.2 U4.7 | length 42.4
  Top Layer w0.254: R7.2 54.587,32.082 v2(56.185,32.082) ; v2(58.293,32.108) 58.293,32.201 58.217,32.277 58.217,43.563 60.3,45.646 69.52,45.646 71.831,47.957 80.642,47.957 82.347,46.253 U4.7
  Bottom Layer w0.254: v2(56.185,32.082) 56.197,32.095 58.28,32.095 v2(58.293,32.108)
SENS_2: R8.2 U6.7 | length 31.8
  Top Layer w0.254: U6.7 9.73,27.741 10.439,28.45 31.394,28.45 35.331,32.387 37.707,32.387 R8.2
SENS_MCU_1: R10.1 U5.13 U7.1 | length 56.7
  Top Layer w0.254: U7.1 52.139,31.946 R10.1 52.299,32.054 52.299,30.939 52.807,30.431 55.982,30.431 57.455,31.904 57.455,43.944 59.766,46.255 69.113,46.255 71.222,48.364 71.222,61.539 68.896,63.865 U5.13
SENS_MCU_2: R11.1 U5.12 U7.7 | length 57.8
  Top Layer w0.254: R11.1 41.083,32.348 41.951,33.216 U7.7 45.431,33.216 45.999,33.784 45.999,37.645 55.397,47.043 68.878,47.043 70.631,48.795 70.631,61.299 68.223,63.707 68.223,65.938 U5.12
SW1: R16.2 SW2.4 U5.25 | length 15.7
  Top Layer w0.254: U5.25 71.296,75.768 71.78,76.253 77.851,76.253 78.791,77.193 R16.2 82.18,78.21 SW2.4@83.69,76.7
SW2: R15.2 SW2.3 U5.26 | length 19.3
  Top Layer w0.254: U5.26 70.496,75.832 71.501,76.837 75.717,76.837 76.388,77.508 76.388,78.176 R15.2 77.37,78.21 77.648,78.488 77.648,80.469 78.334,81.155 82.835,81.155 83.69,80.3 SW2.3
TXD: J6.2 U5.31 | length 15.1
  Top Layer w0.254: J6.2@56.058,81.48 56.058,79.707 59.207,76.558 66.015,76.558 66.496,76.076 U5.31
VREF: R9.1 R13.2 U7.3 U7.5 | length 17.3
  Top Layer w0.254: R13.2 R9.1 41.656,36.222 42.164,35.714 43.462,35.714 U7.5 43.383,35.876 v3(43.383,38.102) ; v3(47.847,38.098) 47.847,35.192 48.553,34.486 U7.3
  Bottom Layer w0.254: v3(43.383,38.102) 43.385,38.1 47.844,38.1 v3(47.847,38.098)
pads on no net: U1.6 U2.7 U3.7 U5.19
copper on no net: | length 0
  Top Layer w0.254: 72.796,69.165 72.821,69.14
  other v2: 73.619,33.192 73.619,33.992 18.516,36.193 18.516,36.993

## Polygon pours and split planes (outlines as drawn)
+5 on Top Layer "+5_L01_P065" (solid, pour order 65): 61.443,73.177 61.443,75.133 60.884,75.692 59.106,75.692
GND on Top Layer "GND_L01_P061" (solid, pour order 61): 72.034,29.974 75.286,29.974 75.692,29.568 80.747,29.568 80.747,28.298 80.747,25.91 72.006,25.91
GND on Top Layer "GND_L01_P060" (solid, pour order 60): 76.327,39.042 76.327,34.8 79.197,34.8 79.197,39.042
GND on Top Layer "GND_L01_P056" (solid, pour order 56): 74.295,34.089 74.295,35.689 77.445,35.689 77.445,34.8 75.743,34.8 75.667,34.724 75.667,34.089
+5 on Top Layer "+5_L01_P055" (solid, pour order 55): 91.821,80.901 87.63,80.901 87.63,75.948 91.821,75.948
GND on Top Layer "GND_L01_P054" (solid, pour order 54): 69.088,54.866 62.23,54.866 62.23,56.263 69.088,56.263
GND on Top Layer "GND_L01_P049" (solid, pour order 49): 17.145,36.07 17.78,36.07 17.78,34.292 10.541,34.292 10.541,35.689 16.764,35.689
+5 on Top Layer "+5_L01_P048" (solid, pour order 48): 61.849,33.073 61.849,23.37 68.199,23.37 68.199,32.895 68.326,33.022 68.072,33.022
+12 on Top Layer "+12_L01_P043" (solid, pour order 43): 45.212,68.455 48.387,68.455 48.387,64.391 45.339,64.391 45.212,64.518
GND on Top Layer "GND_L01_P032" (solid, pour order 32): 26.035,59.438 44.196,59.438 44.196,58.295 45.974,56.517 49.149,56.517 49.149,54.231 26.035,54.231
GND on Top Layer "GND_L01_P039" (solid, pour order 39): 11.176,40.642 18.796,40.642 19.177,40.261 21.082,40.261 21.082,44.071 11.176,44.071
GND on Top Layer "GND_L01_P035" (solid, pour order 35): 57.023,72.771 59.563,72.771 59.563,68.328 57.023,68.328
GND on Top Layer "GND_L01_P033" (solid, pour order 33): 50.292,65.661 50.292,56.771 50.038,56.517 48.641,56.517 48.641,54.231 50.8,54.231 51.308,54.739 51.308,65.661
+12 on Top Layer "+12_L01_P028" (solid, pour order 28): 16.764,72.265 23.241,72.265 23.241,66.042 24.892,64.391 24.892,61.724 16.764,61.724
NetD4_A on Top Layer "NETD4_A_L01_P027" (solid, pour order 27): 17.399,60.327 25.273,60.327 25.273,56.771 17.399,56.771
NetF1_1 on Top Layer "NETF1_1_L01_P025" (solid, pour order 25): 4.445,60.835 14.478,60.835 14.478,56.898 4.445,56.898
GND on Top Layer "GND_L01_P020" (solid, pour order 20): 77.368,71.198 77.368,67.337 80.188,67.337 80.213,67.337 80.239,67.337 80.67,67.337 80.67,71.198
+5 on Top Layer "+5_L01_P019" (solid, pour order 19): 76.632,66.245 78.105,66.245 78.105,64.518 78.08,64.543 76.606,64.543
+5 on Top Layer "+5_L01_P018" (solid, pour order 18): 75.489,70.233 75.844,70.589 75.87,70.563 76.835,70.563 76.835,64.569 76.81,64.543 75.006,64.543 75.006,67.998 72.009,67.998 72.009,68.684 73.838,68.684 73.838,69.674 72.009,69.674 72.009,70.208 71.984,70.233
+5 on Top Layer "+5_L01_P016" (solid, pour order 16): 21.336,79.504 21.336,84.787 43.002,84.787 43.002,78.715 56.212,78.715 61.468,73.459 61.468,68.021 60.198,68.021 60.198,71.732 60.198,73.203 40.894,73.203 40.894,75.44 32.487,75.44 32.487,81.155 23.495,81.155 23.495,79.504
+12 on Top Layer "+12_L01_P014" (solid, pour order 14): 16.764,64.899 48.387,64.899 48.387,61.216 16.764,61.216
GND on Top Layer "GND_L01_P015" (solid, pour order 15): 24.003,80.012 24.003,74.678 30.099,74.678 30.099,80.012
GND on Top Layer "GND_L01_P013" (solid, pour order 13): 23.876,71.399 26.162,71.399 26.162,68.836 30.48,68.836 30.48,66.931 23.876,66.931
+5 on Top Layer "+5_L01_P012" (solid, pour order 12): 16.764,77.472 16.764,76.329 23.495,76.329 23.495,80.52 21.844,80.52 21.336,80.012 21.336,77.472
NetD3_C on Top Layer "NETD3_C_L01_P011" (solid, pour order 11): 16.764,74.043 16.764,73.027 27.94,73.027 27.94,70.233 39.243,70.233 39.243,74.043
NetD1_A on Top Layer "NETD1_A_L01_P005" (solid, pour order 5): 72.161,34.038 72.161,35.714 72.923,35.714 72.923,34.038
+5 on Top Layer "+5_L01_P004" (solid, pour order 4): 19.202,37.086 19.202,39.677 23.444,39.677 23.444,46.865 30.224,46.865 30.048,37.137
+5 on Top Layer "+5_L01_P003" (solid, pour order 3): 72.949,33.098 72.923,33.073 72.923,30.584 61.874,30.584 61.849,30.584 61.849,33.073 61.849,33.098
LED_CATHODE_1 on Top Layer "LED_CATHODE_1_L01_P002" (solid, pour order 2): 74.371,33.098 74.371,31.498 74.689,31.18 75.209,31.701 75.209,31.727 74.955,31.981 74.955,33.098
NetD2_A on Top Layer "NETD2_A_L01_P001" (solid, pour order 1): 19.228,36.095 19.228,33.098 19.99,33.098 19.99,36.095
LED_CATHODE_2 on Top Layer "LED_CATHODE_2_L01_P000" (solid, pour order 0): 17.78,37.086 17.78,38.995 17.077,39.698 16.256,39.698 16.256,38.939 16.689,38.939 17.145,38.483 17.145,37.086
+5 on Bottom Layer "NONET_L-01_P-001" (solid, pour order 68): 23.4,39.7 23.4,22.9 68.2,22.9 68.2,27.9 34,27.9 32.4,29.5 32.4,39.7
+5 on Bottom Layer "NONET_L-01_P-001" (solid, pour order 67): 23.419,46.838 23.556,46.7 54,46.7 54,39 53.9,39.1 23.4,39.1
GND on Bottom Layer "GND_L02_P066" (solid, pour order 66): 66.192,82.245 66.192,80.543 68.224,80.543 68.25,80.518 68.25,82.245
GND on Bottom Layer "GND_L02_P036" (solid, pour order 36): 75.946,85.6 2.921,85.6 2.921,68.074 16.764,68.074 16.764,82.044 75.946,82.044
+5 on Bottom Layer "+5_L02_P044" (solid, pour order 44): 53.975,76.683 53.975,41.023 52.045,39.093 39.37,39.093 39.37,40.515 47.295,40.515 49.784,43.004 49.784,44.579 49.784,76.683
GND on Bottom Layer "GND_L02_P064" (solid, pour order 64): 37.236,38.432 34.9,38.432 34.9,34.343 37.236,34.343
GND on Bottom Layer "GND_L02_P062" (solid, pour order 62): 35.331,37.137 58.674,37.137 71.476,49.938 75.006,49.938 75.006,34.952 74.447,34.394 35.281,34.394
GND on Bottom Layer "GND_L02_P059" (solid, pour order 59): 86.411,49.151 85.623,49.938 74.524,49.938 74.524,24.157 86.677,24.157
GND on Bottom Layer "GND_L02_P058" (solid, pour order 58): 63.881,56.898 63.906,56.873 86.817,56.873 88.798,54.891 88.798,24.183 84.887,24.183 84.887,53.418 83.871,54.434 57.023,54.434 57.023,56.873
+5 on Bottom Layer "+5_L02_P017" (solid, pour order 17): 90.5,79.352 82.321,79.352 82.321,66.245 75.768,66.245 75.768,64.645 75.667,64.543 84.582,64.543 84.582,77.853 84.607,77.878 90.526,77.878
GND on Bottom Layer "GND_L02_P053" (solid, pour order 53): 57.023,67.566 57.023,54.866 63.881,54.866 63.881,56.898 60.325,56.898 60.325,67.566
GND on Bottom Layer "GND_L02_P051" (solid, pour order 51): 10.795,35.689 10.795,20.449 15.875,20.449 15.875,35.689
GND on Bottom Layer "GND_L02_P050" (solid, pour order 50): 2.921,67.058 2.921,41.785 10.795,33.911 15.875,33.911 15.875,43.563 9.017,50.421 9.017,67.058
+5 on Bottom Layer "+5_L02_P045" (solid, pour order 45): 39.37,39.245 39.37,40.515 41.275,40.515 41.275,39.245
GND on Bottom Layer "GND_L02_P034" (solid, pour order 34): 57.023,71.884 57.023,67.312 78.74,67.312 78.74,71.884
GND on Bottom Layer "GND_L02_P030" (solid, pour order 30): 26.035,63.629 26.035,53.977 31.242,53.977 31.242,60.454 31.242,63.629
GND on Bottom Layer "GND_L02_P023" (solid, pour order 23): 2.921,68.582 2.921,62.359 31.242,62.359 31.242,68.582
GND on Bottom Layer "GND_L02_P022" (solid, pour order 22): 16.51,82.171 31.242,82.171 31.242,66.042 16.51,66.042
GND on Bottom Layer "GND_L02_P021" (solid, pour order 21): 73.152,85.6 73.152,79.377 78.359,79.377 78.359,67.312 81.026,67.312 80.899,67.439 80.899,85.6

## Silkscreen, mask and mechanical layers (free items; w line width, h text height)
Top Overlay:
  lines w0.125: 57.958,54.512 58.958,54.512 58.958,55.512 59.958,55.512 59.958,54.512 60.958,54.512 60.958,55.512 61.958,55.512 61.958,54.512 62.958,54.512 ; 57.958,56.762 58.958,56.762 58.958,57.762 59.458,57.762 59.458,56.762 60.958,56.762 60.958,57.762 61.458,57.762 61.458,56.762 62.958,56.762 ; 58,59 63,59 ; 69.958,54.512 70.958,54.512 70.958,55.512 71.958,55.512 71.958,54.512 72.958,54.512 72.958,55.512 73.958,55.512 73.958,54.512 74.958,54.512 ; 69.958,56.762 70.958,56.762 70.958,57.762 71.458,57.762 71.458,56.762 72.958,56.762 72.958,57.762 73.458,57.762 73.458,56.762 74.958,56.762 ; 70.25,59 75.25,59
  text "BRIGHTNESS CONTROL" at 82.75,83.012 h1.27
  text "PD4" at 44.78,79.451 h2 r270
  text "PD2" at 47.493,79.451 h2 r270
  text "PC5" at 50.224,79.451 h2 r270
  text "PC4" at 52.937,79.451 h2 r270
  text "TX" at 55.631,79.451 h2 r270
  text "RX" at 58.344,79.451 h2 r270
  text "MODE" at 74.5,76.262 h1.27
  text "SW1" at 77.751,76.262 h1.27
  text "SW2" at 80.001,76.262 h1.27
  text "+" at 30.252,75.345 h1
  text "REM" at 74.75,75.25 h1.27
  text "0" at 78.501,75.262 h1.27
  text "0" at 80.501,75.262 h1.27
  text "LVL1" at 74.75,74.25 h1.27
  text "0" at 78.501,74.262 h1.27
  text "1" at 80.501,74.25 h1.27
  text "+5V" at 47.576,74.189 h2
  text "0" at 80.501,73.262 h1.27
  text "LVL2" at 74.75,73.25 h1.27
  text "1" at 78.501,73.25 h1.27
  text "LVL3" at 74.75,72.262 h1.27
  text "1" at 78.501,72.25 h1.27
  text "1" at 80.501,72.25 h1.27
  text "IN+" at 88.064,71.732 h2
  text "GND" at 48.057,70.379 h2
  text "IN-" at 88.089,68.963 h2
  text "GND" at 4.343,67.915 h2
  text "PC0" at 87.022,63.698 h2
  text "ADC7" at 87.022,61.082 h2
  text "+" at 25.071,60.409 h1
  text "MAN MODE" at 52.5,59.012 h1.27
  text "ON" at 75.751,58.762 h1.27
  text "PB2" at 87.022,58.498 h2
  text "OPT2" at 55.501,56.762 h1.27
  text "OPT1" at 75.63,56.521 h1.27
  text "GND" at 87.02,55.926 h2
  text "POWER STATUS" at 39.25,55.262 h1.27
  text "OPT3" at 55.559,54.513 h1.27
  text "ERROR" at 75.75,54.512 h1.27
  text "+12V" at 4.117,53.621 h2
  text "MISO" at 88.266,43.753 h1.27
  text "+5V" at 92.397,43.763 h1.27
  text "MOSI" at 91.903,42.628 h1.27
  text "SCK" at 88.266,42.622 h1.27
  text "RST" at 88.266,41.492 h1.27
  text "GND" at 92.1,41.492 h1.27
  text "+" at 71.934,39.988 h1
  text "LED +" at 86.54,37.67 h2
  text "LED -" at 5.234,37.543 h2
  text "LED +" at 5.158,34.673 h2
  text "LED -" at 86.59,34.571 h2
  text "+" at 20.042,31.25 h1
  text "PCB No : AA-AGL-RE-THD-001+MON" at 3.295,27.176 h2 r270
  text "Version 1.001" at 0.857,27.127 h2 r270
  text "July-2021" at 78.183,1.539 h2
Board Outline:
  the board outline again, w0.125

## Dimensions
0,86.5 to 0,0 on Mechanical 1
0,86.5 to 95,86.5 on Mechanical 1